# EAGLE board LoraGateway (EAGLE 9.3.0)

Size 65 x 30 mm. Coordinates in mm from the lower left corner, seen from the top.
Outline: 0,27 0,3 arc90 3,0 62,0 arc90 65,3 65,27 arc90 62,30 3,30 arc90 0,27
Copper layers (1*2*15*16): Top 0.035mm / dielectric 0.2mm / Route2 0.035mm / dielectric 1.2mm / Route15 0.035mm / dielectric 0.2mm / Bottom 0.035mm
Design rules "Elecrow_4-layer_PCB_eagle_rule": minimum track width 6mil, minimum drill 12mil, track to track 6mil, track to pad 6mil, pad to pad 6mil, via to via 8mil, smd to smd 0mil, copper to edge 20mil, drill to drill 10mil, minimum pad ring 6mil, minimum via ring 6mil, stop-mask expansion 0mil, vias tented up to drill 100mil, thermal gap 10mil
Net classes: 0 default: width 0.2 mm

## Footprints (pad centres in the part's own frame; a part is rotated, then mirrored left to right if it is on the bottom)
C1206 = smd 1.6 x 1.8: 1 -1.4,0; 2 1.4,0
C0805 = smd 1.3 x 1.5: 1 -0.95,0; 2 0.95,0
C0603 = smd 1.1 x 1: 1 -0.85,0; 2 0.85,0
C0402 = smd 0.7 x 0.9: 1 -0.65,0; 2 0.65,0
SLP1006P2T = smd 0.6 x 0.55: 1 0,0.425; 2 0,-0.425
SOD523 = smd 0.7 x 0.5: A 0.7,0; C -0.6,0
LXES15AAA1-153 = smd 0.4 x 0.5: 1 -0.4,0; 2 0.4,0
L0402 = smd 0.6 x 0.7: 1 -0.5,0; 2 0.5,0
L0603 = smd 1 x 1.1: 1 -0.85,0; 2 0.85,0
RPI-ZERO = drill 1 pad 1.778 square: 1 8.37,25.23 | drill 1 pad 1.778: 2 8.37,27.77; 3 10.91,25.23; 4 10.91,27.77; 5 13.45,25.23; 6 13.45,27.77; 7 15.99,25.23; 8 15.99,27.77; 9 18.53,25.23; 10 18.53,27.77; 11 21.07,25.23; 12 21.07,27.77; 13 23.61,25.23; 14 23.61,27.77; 15 26.15,25.23; 16 26.15,27.77; 17 28.69,25.23; 18 28.69,27.77; 19 31.23,25.23; 20 31.23,27.77; 21 33.77,25.23; 22 33.77,27.77; 23 36.31,25.23; 24 36.31,27.77; 25 38.85,25.23; 26 38.85,27.77; 27 41.39,25.23; 28 41.39,27.77; 29 43.93,25.23; 30 43.93,27.77; 31 46.47,25.23; 32 46.47,27.77; 33 49.01,25.23; 34 49.01,27.77; 35 51.55,25.23; 36 51.55,27.77; 37 54.09,25.23; 38 54.09,27.77; 39 56.63,25.23; 40 56.63,27.77 | hole 2.75: 3.5,3.5; 61.5,3.5; 61.5,26.5; 3.5,26.5
ASPI-0418 = smd 1.5 x 3.6: 1 -1.525,0; 2 1.525,0
LTST-C930KGKT = smd 1.1 x 2.8: 1 -1.55,0; 2 1.55,0
R0402 = smd 0.6 x 0.7: 1 -0.5,0; 2 0.5,0
EXB28V = smd 0.525 x 0.5: 1 -0.875,-0.45; 4 0.875,-0.45; 5 0.875,0.45; 8 -0.875,0.45 | smd 0.25 x 0.5: 2 -0.25,-0.45; 3 0.25,-0.45; 6 0.25,0.45; 7 -0.25,0.45
2X3MLPQ-W18 = smd 0.775 x 0.2: 1 -0.963,1.2; 2 -0.963,0.8; 3 -0.963,0.4; 4 -0.963,0; 5 -0.963,-0.4; 6 -0.963,-0.8; 7 -0.963,-1.2; 10 0.963,-1.2; 11 0.963,-0.8; 12 0.963,-0.4; 13 0.963,0; 14 0.963,0.4; 15 0.963,0.8; 16 0.963,1.2 | smd 0.2 x 0.775: 8 -0.2,-1.462; 9 0.2,-1.462; 17 0.2,1.462; 18 -0.2,1.462 | smd 0.286 x 0.7: T1 0,0.5; T2 0,-0.5
MLPQ-UT8 = smd 0.75 x 0.2: 1 -0.725,0.4; 2 -0.725,0; 3 -0.725,-0.4; 5 0.725,-0.4; 6 0.725,0; 7 0.725,0.4 | smd 0.2 x 0.75: 4 0,-0.725; 8 0,0.725
3X3MLPD-8 = smd 0.4 x 0.75: 1 -0.975,-1.475; 2 -0.325,-1.475; 3 0.325,-1.475; 4 0.975,-1.475; 5 0.975,1.475; 6 0.325,1.475; 7 -0.325,1.475; 8 -0.975,1.475 | smd 2.58 x 1.7: GND 0,0
QFN64-9X9 = smd 0.85 x 0.3: 1 -4.475,3.75; 2 -4.475,3.25; 3 -4.475,2.75; 4 -4.475,2.25; 5 -4.475,1.75; 6 -4.475,1.25; 7 -4.475,0.75; 8 -4.475,0.25; 9 -4.475,-0.25; 10 -4.475,-0.75; 11 -4.475,-1.25; 12 -4.475,-1.75; 13 -4.475,-2.25; 14 -4.475,-2.75; 15 -4.475,-3.25; 16 -4.475,-3.75; 33 4.475,-3.75; 34 4.475,-3.25; 35 4.475,-2.75; 36 4.475,-2.25; 37 4.475,-1.75; 38 4.475,-1.25; 39 4.475,-0.75; 40 4.475,-0.25; 41 4.475,0.25; 42 4.475,0.75; 43 4.475,1.25; 44 4.475,1.75; 45 4.475,2.25; 46 4.475,2.75; 47 4.475,3.25; 48 4.475,3.75 | smd 0.3 x 0.85: 17 -3.75,-4.475; 18 -3.25,-4.475; 19 -2.75,-4.475; 20 -2.25,-4.475; 21 -1.75,-4.475; 22 -1.25,-4.475; 23 -0.75,-4.475; 24 -0.25,-4.475; 25 0.25,-4.475; 26 0.75,-4.475; 27 1.25,-4.475; 28 1.75,-4.475; 29 2.25,-4.475; 30 2.75,-4.475; 31 3.25,-4.475; 32 3.75,-4.475; 49 3.75,4.475; 50 3.25,4.475; 51 2.75,4.475; 52 2.25,4.475; 53 1.75,4.475; 54 1.25,4.475; 55 0.75,4.475; 56 0.25,4.475; 57 -0.25,4.475; 58 -0.75,4.475; 59 -1.25,4.475; 60 -1.75,4.475; 61 -2.25,4.475; 62 -2.75,4.475; 63 -3.25,4.475; 64 -3.75,4.475 | smd 7.3 x 7.3: EXP 0,0
QFN32 = smd 0.8 x 0.3: 1 -2.45,1.75; 2 -2.45,1.25; 3 -2.45,0.75; 4 -2.45,0.25; 5 -2.45,-0.25; 6 -2.45,-0.75; 7 -2.45,-1.25; 8 -2.45,-1.75; 17 2.45,-1.75; 18 2.45,-1.25; 19 2.45,-0.75; 20 2.45,-0.25; 21 2.45,0.25; 22 2.45,0.75; 23 2.45,1.25; 24 2.45,1.75 | smd 0.3 x 0.8: 9 -1.75,-2.45; 10 -1.25,-2.45; 11 -0.75,-2.45; 12 -0.25,-2.45; 13 0.25,-2.45; 14 0.75,-2.45; 15 1.25,-2.45; 16 1.75,-2.45; 25 1.75,2.45; 26 1.25,2.45; 27 0.75,2.45; 28 0.25,2.45; 29 -0.25,2.45; 30 -0.75,2.45; 31 -1.25,2.45; 32 -1.75,2.45 | smd 3.3 x 3.3: EXP 0,0
DCC6C-3X3 = smd 0.6 x 1.65: 1 -1.2,0.85 | smd 0.6 x 0.95: 2 0,1.2; 5 0,-1.2 | smd 0.6 x 0.85: 3 1.2,1.25; 4 1.2,-1.25; 6 -1.2,-1.25
VQFN24-4X4 = smd 0.7 x 0.3: 1 -1.9,1.25; 2 -1.9,0.75; 3 -1.9,0.25; 4 -1.9,-0.25; 5 -1.9,-0.75; 6 -1.9,-1.25; 13 1.9,-1.25; 14 1.9,-0.75; 15 1.9,-0.25; 16 1.9,0.25; 17 1.9,0.75; 18 1.9,1.25 | smd 0.3 x 0.7: 7 -1.25,-1.9; 8 -0.75,-1.9; 9 -0.25,-1.9; 10 0.25,-1.9; 11 0.75,-1.9; 12 1.25,-1.9; 19 1.25,1.9; 20 0.75,1.9; 21 0.25,1.9; 22 -0.25,1.9; 23 -0.75,1.9; 24 -1.25,1.9 | smd 2.5 x 2.5: GND 0,0
USB-2-MICRO = smd 0.4 x 1.4: 1 -1.3,4.3; 2 -0.65,4.3; 3 0,4.3; 4 0.65,4.3; 5 1.3,4.3 | smd 2.3 x 1.9: 6 -3.75,1.45; 9 3.75,1.45 | smd 1.8 x 1.9: 7 -1.15,1.45; 8 1.15,1.45
2.5X2.0MM = smd 1 x 1: 1 -0.825,-0.625; 2 0.825,-0.625; 3 0.825,0.625; 4 -0.825,0.625
2.0X1.6MM = smd 0.6 x 0.8: 1 -0.9,-0.6; 2 0.9,-0.6; 3 0.9,0.6; 4 -0.9,0.6
J502-ND-142-0711-871/876 = smd 4.25 x 1.5: 1 -0.2,0 | smd 3.95 x 1.5: G@1 -0.35,-2.77; G@2 -0.35,2.77 | smd 3.95 x 1.5 bottom: G@3 -0.35,2.77; G@4 -0.35,-2.77

## Placement (x,y rotation side)
C1  22uF  [C1206]  7.6,87.45 180 bottom  (outside the outline)
C2  10uF  [C1206]  6,91.2 90 bottom  (outside the outline)
C3  10uF  [C1206]  12.75,92.8 270 bottom  (outside the outline)
C4  22uF  [C1206]  10.25,96.45 0 bottom  (outside the outline)
C5  1µF  [C0805]  -0.95,84 180 top  (outside the outline)
C6  2.2uF  [C0603]  52.45,80.9 0 bottom  (outside the outline)
C7  10uF  [C0805]  79.2,87.58 90 bottom  (outside the outline)
C8  100nF  [C0402]  58.7,80.9 90 bottom  (outside the outline)
C9  1uF  [C0805]  52.95,82.95 0 bottom  (outside the outline)
C10  10uF  [C0805]  80.2,91.75 0 bottom  (outside the outline)
C11  1uF  [C0805]  52.95,78.85 0 bottom  (outside the outline)
C23  10µF  [C0805]  36.15,72.05 270 top  (outside the outline)
C24  10nF  [C0402]  42.2,89.28 270 top  (outside the outline)
C25  1µF  [C0603]  26.65,79.4 180 top  (outside the outline)
C26  100nF  [C0402]  26.65,80.95 180 top  (outside the outline)
C27  100nF  [C0402]  26.65,77.85 180 top  (outside the outline)
C28  56pF  [C0402]  82.05,79.65 0 bottom  (outside the outline)
C29  56pF  [C0402]  82.05,76.5 0 bottom  (outside the outline)
C30  100nF  [C0402]  32.9,87.85 90 top  (outside the outline)
C31  100nF  [C0402]  34.6,72.35 270 top  (outside the outline)
C32  100nF  [C0402]  37.7,72.35 270 top  (outside the outline)
C33  100nF  [C0402]  37.7,87.35 90 top  (outside the outline)
C34  1µF  [C0603]  39.25,87.35 90 top  (outside the outline)
C35  100nF  [C0402]  42,80.35 0 top  (outside the outline)
C36  10µF  [C0805]  24.9,87.7 0 bottom  (outside the outline)
C37  1µF  [C0603]  25,83.6 0 bottom  (outside the outline)
C38  1µF  [C0603]  51.9,86.75 270 top  (outside the outline)
C39  100nF  [C0402]  48.8,82.65 180 bottom  (outside the outline)
C40  1nF  [C0402]  53.2,96.4 90 top  (outside the outline)
C41  100nF  [C0402]  54.9,96.4 270 top  (outside the outline)
C42  100nF  [C0402]  56.5,96.4 270 top  (outside the outline)
C43  10nF  [C0402]  60.6,96.4 270 top  (outside the outline)
C44  56pF  [C0402]  65.4,88.2 270 top  (outside the outline)
C45  1µF  [C0603]  58.05,96.2 90 top  (outside the outline)
C46  1µF  [C0603]  62.15,96.2 90 top  (outside the outline)
C47  1µF  [C0603]  50.2,66.55 180 top  (outside the outline)
C48  1nF  [C0402]  53.5,74.4 90 top  (outside the outline)
C49  100nF  [C0402]  54.6,74.4 270 top  (outside the outline)
C50  100nF  [C0402]  55.7,74.4 270 top  (outside the outline)
C51  10nF  [C0402]  59.65,74.4 270 top  (outside the outline)
C52  100nF  [C0402]  59.9,65.7 270 top  (outside the outline)
C53  1µF  [C0603]  61.2,74.2 90 top  (outside the outline)
C54  1µF  [C0603]  57.25,74.2 90 top  (outside the outline)
C55  56pF  [C0402]  67.6,86.85 270 top  (outside the outline)
C56  56pF  [C0402]  78.35,74.35 0 top  (outside the outline)
C57  5.6pF  [C0402]  80.45,75 90 top  (outside the outline)
C58  4.7µF  [C0603]  87,87.65 180 top  (outside the outline)
C59  3.3pF  [C0402]  82.95,81.75 180 top  (outside the outline)
C60  10nF  [C0402]  90.25,87.3 180 top  (outside the outline)
C61  56pF  [C0402]  86.8,76.45 90 top  (outside the outline)
C62  150pF  [C0402]  87.2,83.9 180 top  (outside the outline)
C63  22pF  [C0402]  90.25,83.9 180 top  (outside the outline)
C64  1nF  [C0402]  94,86.1 0 top  (outside the outline)
C65  3.3pF  [C0402]  95.5,78.6 270 top  (outside the outline)
C66  33pF  [C0402]  94,87.3 0 top  (outside the outline)
C67  7.5pF  [C0402]  97.2,84.3 0 top  (outside the outline)
C68  1.5pF  [C0402]  97.85,80.3 0 top  (outside the outline)
C69  3.3pF  [C0402]  100.2,78.6 270 top  (outside the outline)
C70  5.1pF  [C0402]  97.2,83.2 0 top  (outside the outline)
C71  2.7pF  [C0402]  104.05,78.6 270 top  (outside the outline)
C72  5.1pF  [C0402]  97.2,82 0 top  (outside the outline)
C73  56pF  [C0402]  107.35,79.25 0 top  (outside the outline)
C74  100nF  [C0402]  59.85,87.05 270 top  (outside the outline)
D1  RCLAMP0531T  [SLP1006P2T]  -2.1,78.28 0 top  (outside the outline)
D2  RCLAMP0531T  [SLP1006P2T]  -0.9,81.72 180 top  (outside the outline)
D5  BAT54XV2T1G  [SOD523]  51.25,92.75 180 top  (outside the outline)
D6  BAT54XV2T1G  [SOD523]  52.15,72.4 90 top  (outside the outline)
D7  LXES15AAA1-153  [LXES15AAA1-153]  105.3,78.85 270 top  (outside the outline)
FB1  [L0402]  -8,85.95 180 top  (outside the outline)
FB2  [L0402]  -2.1,81.8 90 top  (outside the outline)
FB3  [L0402]  -1,78.25 270 top  (outside the outline)
FB4  [L0402]  81.03,85.35 90 bottom  (outside the outline)
FB7  [L0402]  43.35,90.42 270 top  (outside the outline)
FB8  [L0402]  25.85,85.65 270 bottom  (outside the outline)
FB9  [L0402]  48.65,83.7 0 bottom  (outside the outline)
FB10  [L0603]  87,89.7 0 top  (outside the outline)
J1  RPI-ZERO-HEADER  [RPI-ZERO]  65,30 180 top
L1  2.2µ  [ASPI-0418]  2.45,89.65 270 bottom  (outside the outline)
L2  2.2µ  [ASPI-0418]  16.35,94.35 270 bottom  (outside the outline)
L3  33nH  [L0402]  63.65,74.35 180 top  (outside the outline)
L4  3.9nH  [L0402]  75.75,74.35 180 top  (outside the outline)
L5  3.3nH  [L0402]  87.85,85.6 90 top  (outside the outline)
L6  4.7nH  [L0402]  90.9,85.6 90 top  (outside the outline)
L7  6.8nH  [L0402]  91.95,85.6 270 top  (outside the outline)
L8  2.7nH  [L0402]  94.65,84.5 180 top  (outside the outline)
L9  5.6nH  [L0402]  97.85,79.25 180 top  (outside the outline)
L10  5.6nH  [L0402]  102.15,79.25 180 top  (outside the outline)
L11  6.2nH  [L0402]  95.15,82.5 90 top  (outside the outline)
P2  LTST-C930KGKT  [LTST-C930KGKT]  72.2,90.3 270 top  (outside the outline)
P3  LTST-C930KGKT  [LTST-C930KGKT]  76.2,90.3 270 top  (outside the outline)
R1  16k  [R0402]  26,70.05 180 top  (outside the outline)
R2  12k  [R0402]  26,69 0 top  (outside the outline)
R4  10k  [R0402]  59.85,81.4 270 bottom  (outside the outline)
R5  10k  [R0402]  57.15,82.65 0 bottom  (outside the outline)
R12  10k  [R0402]  23.05,85.1 270 top  (outside the outline)
R13  100  [R0402]  82.2,78.6 0 bottom  (outside the outline)
R14  100  [R0402]  82.2,77.55 0 bottom  (outside the outline)
R15  0  [R0402]  37.85,90.42 90 top  (outside the outline)
R16  470  [R0402]  72.7,93.3 180 top  (outside the outline)
R17  470  [R0402]  75.7,93.3 0 top  (outside the outline)
R18  100  [R0402]  47.4,91.75 0 top  (outside the outline)
R19  100  [R0402]  50.45,72.95 0 top  (outside the outline)
R20  EXB-N8V101JX  [EXB28V]  48,86 0 top  (outside the outline)
R21  EXB-N8V101JX  [EXB28V]  48,74 180 top  (outside the outline)
R22  100  [R0402]  50.45,71.9 180 top  (outside the outline)
R23  300  [R0402]  77.55,81.25 270 top  (outside the outline)
R24  18  [R0402]  79.2,81.75 180 top  (outside the outline)
R25  300  [R0402]  80.85,81.25 270 top  (outside the outline)
R26  49R9  [R0402]  85.6,77.2 90 top  (outside the outline)
R27  49R9  [R0402]  95,76.55 180 top  (outside the outline)
U1  SC283  [2X3MLPQ-W18]  9,92 180 bottom  (outside the outline)
U2  SC560H  [MLPQ-UT8]  56.65,80.9 180 bottom  (outside the outline)
U3  [3X3MLPD-8]  22,70 0 top  (outside the outline)
U5  [QFN64-9X9]  35,80 0 top  (outside the outline)
U6  SX1257  [QFN32]  56,91 270 top  (outside the outline)
U7  SX1257  [QFN32]  56,69 270 top  (outside the outline)
U8  [DCC6C-3X3]  74.75,81.75 90 top  (outside the outline)
U9  [DCC6C-3X3]  83.35,74.35 270 top  (outside the outline)
U10  SE2435L  [VQFN24-4X4]  91.15,80 0 top  (outside the outline)
U11  [DCC6C-3X3]  91.4,73.35 270 top  (outside the outline)
X1  USB2-MICRO  [USB-2-MICRO]  -9.95,80 270 top  (outside the outline)
X3  END4825A  [2.5X2.0MM]  40.2,90.55 180 top  (outside the outline)
X4  END4263A  [2.0X1.6MM]  48.8,80.65 270 bottom  (outside the outline)
X5  SMA-KE11  [J502-ND-142-0711-871/876]  111.56,79.25 0 top  (outside the outline)

## Library data of the parts
C1 C4 = rcl; OC_DIGIKEY: 445-6001-1-ND; SPICEPREFIX: C
C2 C3 = rcl; OC_DIGIKEY: 490-5525-1-ND; SPICEPREFIX: C
C5 C9 C11 = rcl; OC_DIGIKEY: 490-1691-1-ND; SPICEPREFIX: C
C6 = rcl; OC_DIGIKEY: 1276-1878-1-ND; SPICEPREFIX: C
C7 C10 C23 C36 = rcl; OC_DIGIKEY: 1276-2399-1-ND; SPICEPREFIX: C
C8 C26 C27 C30-C33 C35 C39 C41 C42 C49 C50 C52 C74 = rcl; OC_DIGIKEY: 478-7888-1-ND; SPICEPREFIX: C
C24 C43 C51 C60 = rcl; OC_DIGIKEY: 478-7867-1-ND; SPICEPREFIX: C
C25 C34 C37 C38 C45-C47 C53 C54 = rcl; OC_DIGIKEY: 490-1543-1-ND; SPICEPREFIX: C
C28 C29 C44 C55 C56 C61 C73 = rcl; OC_DIGIKEY: 490-1288-1-ND; SPICEPREFIX: C
C40 C48 C64 = rcl; OC_DIGIKEY: 490-6348-1-ND; SPICEPREFIX: C
C57 = rcl; OC_DIGIKEY: 490-6250-1-ND; SPICEPREFIX: C
C58 = rcl; OC_DIGIKEY: 1276-1905-1-ND; SPICEPREFIX: C
C59 C65 C69 = rcl; OC_DIGIKEY: 490-6238-1-ND; SPICEPREFIX: C
C62 = rcl; OC_DIGIKEY: 311-1025-1-ND; SPICEPREFIX: C
C63 = rcl; OC_DIGIKEY: 490-11382-1-ND; SPICEPREFIX: C
C66 = rcl; OC_DIGIKEY: 490-5936-1-ND; SPICEPREFIX: C
C67 = rcl; OC_DIGIKEY: 490-8227-1-ND; SPICEPREFIX: C
C68 = rcl; OC_DIGIKEY: 490-6212-1-ND; SPICEPREFIX: C
C70 C72 = rcl; OC_DIGIKEY: 490-8215-1-ND; SPICEPREFIX: C
C71 = rcl; OC_DIGIKEY: 490-6229-1-ND; SPICEPREFIX: C
D1 D2 = LoRa Gateway; OC_DIGIKEY: RCLAMP0531TTCTCT-ND
D5 D6 = LoRa Gateway; OC_DIGIKEY: BAT54XV2T1GOSCT-ND
D7 = LoRa Gateway; OC_DIGIKEY: 490-13210-1-ND
FB1-FB4 FB7-FB9 = LoRa Gateway; OC_DIGIKEY: 490-5976-1-ND
FB10 = LoRa Gateway; OC_DIGIKEY: 490-7815-1-ND
J1 U3 = LoRa Gateway
L1 L2 = LoRa Gateway; OC_DIGIKEY: 535-10759-1-ND
L3 = LoRa Gateway; OC_DIGIKEY: 490-1152-1-ND
L4 = LoRa Gateway; OC_DIGIKEY: 490-6815-1-ND
L5 = LoRa Gateway; OC_DIGIKEY: 490-6809-1-ND
L6 = LoRa Gateway; OC_DIGIKEY: 490-1139-1-ND
L7 = LoRa Gateway; OC_DIGIKEY: 490-1142-1-ND
L8 = LoRa Gateway; OC_DIGIKEY: 490-1137-1-ND
L9 L10 = LoRa Gateway; OC_DIGIKEY: 490-6834-1-ND
L11 = LoRa Gateway; OC_DIGIKEY: 490-1141-1-ND
P2 P3 = LoRa Gateway; OC_DIGIKEY: 160-1463-1-ND
R1 R2 R4 R12 = rcl; OC_DIGIKEY: 541-10KJCT-ND; SPICEPREFIX: R
R5 = rcl; OC_DIGIKEY: 311-100KJRCT-ND; SPICEPREFIX: R
R13 R14 R18 R19 R22 = rcl; OC_DIGIKEY: 541-100ATCT-ND; SPICEPREFIX: R
R15 = rcl; OC_DIGIKEY: 541-4062-1-ND; SPICEPREFIX: R
R16 R17 = rcl; OC_DIGIKEY: 311-470JRCT-ND; SPICEPREFIX: R
R20 R21 = LoRa Gateway; OC_DIGIKEY: Y10101CT-ND
R23 R25 = rcl; OC_DIGIKEY: RMCF0402FT300RCT-ND; SPICEPREFIX: R
R24 = rcl; OC_DIGIKEY: A129606CT-ND; SPICEPREFIX: R
R26 R27 = rcl; OC_DIGIKEY: 541-3967-1-ND; SPICEPREFIX: R
U1 = LoRa Gateway; OC_DIGIKEY: SC283WLCT-ND
U2 = LoRa Gateway; OC_DIGIKEY: SC560HULCT-ND
U5 = LoRa Gateway; OC_DIGIKEY: SX1308IMLTRTCT-ND
U6 U7 = LoRa Gateway; OC_DIGIKEY: SX1257IWLTRTCT-ND
U8 U9 U11 = LoRa Gateway; OC_DIGIKEY: 495-3734-1-ND
U10 = LoRa Gateway; OC_DIGIKEY: 863-1349-1-ND
X1 = LoRa Gateway; OC_DIGIKEY: 609-4052-1-ND
X3 = LoRa Gateway; OC_DIGIKEY: 644-1329-1-ND
X4 = LoRa Gateway; OC_DIGIKEY: 644-1328-1-ND
X5 = LoRa Gateway; OC_DIGIKEY: 931-1175-ND

## Nets
133M_OUT_EN: X3.1
+5V: C2.1 C3.1 C5.2 C6.1 FB2.2 R4.1 R5.1 U1.1 U1.5 U1.8 U1.10 U1.14 U1.15 U1.16 U1.17 U2.2
CLKHS: R15.2 U5.53
CLKI: R18.2 U6.11
CLKO_B: R19.2 R22.1 U7.10
CLKO_B_32M: R22.2
FEM_EN: U3.2 U10.1
GND: C1.2 C2.2 C3.2 C4.2 C5.1 C6.2 C7.2 C8.2 C9.2 C10.2 C11.2 C23.2 C24.2 C25.2 C26.2 C27.2 C28.2 C29.2 C30.2 C31.2 C32.2 C33.2 C34.2 C35.2 C36.2 C37.2 C38.2 C39.2 C41.1 C42.1 C43.1 C44.2 C45.2 C46.2 C47.2 C49.1 C50.1 C51.1 C52.2 C53.2 C54.2 C57.2 C58.2 C60.2 C62.2 C63.2 C64.2 C65.2 C66.2 C67.2 C69.2 C70.2 C71.2 C72.2 C74.2 D1.2 D2.2 D7.2 FB1.1 FB3.2 L3.2 P2.2 P3.2 R2.1 R12.1 R21.1 R21.2 R21.7 R21.8 R23.2 R25.2 R26.1 R27.1 U1.3 U1.4 U1.6 U1.7 U1.12 U1.13 U1.T1 U1.T2 U2.5 U3.8 U3.GND U5.6 U5.7 U5.10 U5.11 U5.16 U5.24 U5.30 U5.31 U5.32 U5.33 U5.34 U5.40 U5.41 U5.48 U5.49 U5.50 U5.51 U5.59 U5.EXP U6.4 U6.7 U6.26 U6.28 U6.31 U6.EXP U7.4 U7.7 U7.12 U7.13 U7.26 U7.28 U7.31 U7.EXP U8.1 U8.3 U8.4 U8.6 U9.1 U9.3 U9.4 U9.6 U10.7 U10.8 U10.10 U10.13 U10.15 U10.17 U10.18 U10.GND U11.1 U11.3 U11.4 U11.6 X3.2 X4.1 X4.2 X5.G@1 X5.G@2 X5.G@3 X5.G@4
GPIO0: U5.58
GPIO2: U5.56
GPIO3: U5.55
IRXD_A: R20.5 U6.15
IRXD_B: R21.5 U7.15
ITXD_A: R20.7 U6.13
LNA_EN: C28.1 R13.1 U10.3
MISO_A: U5.62 U6.18
MISO_B: U5.21 U7.18
MOSI_A: U5.63 U6.19
MOSI_B: U5.20 U7.19
N$1: L1.1 U1.2
N$2: L2.2 U1.11
N$3: R1.1 R2.2 U3.7
N$4: C8.1 U2.7
N$6: D1.1 FB3.1 X1.5
N$9: FB1.2 X1.6 X1.7 X1.8 X1.9
N$12: C7.1 FB4.2 U3.3
N$13: C74.1 U6.25
N$14: P2.1 R16.2
N$15: P3.1 R17.2
N$16: C24.1 FB7.2 X3.4
N$17: R15.1 X3.3
N$18: C39.1 FB9.2 X4.4
N$19: R27.2 U10.12
N$20: U10.9 U11.5
N$21: U10.11 U11.2
N$22: R26.2 U10.5
N$23: C63.1 L6.1 U10.23
N$24: C67.1 C70.1 L8.1 L11.2
N$25: C62.1 L5.1 U10.24
N$26: L7.2 U10.21
N$27: C68.2 C69.1 L9.1 L10.2
N$28: R13.2 U5.14
N$29: R14.2 U5.15
N$30: L8.2 U10.20
N$31: C72.1 L11.1 U10.16
N$32: C65.1 C68.1 L9.2 U10.14
N$34: C71.1 C73.1 D7.1 L10.1
N$35: C59.1 U10.2
N$36: C61.2 U10.6
N$37: C59.2 R24.1 R25.1
N$38: C31.1 U5.23
N$39: R23.1 R24.2 U8.5
N$40: C55.2 U8.2
N$41: C61.1 U9.2
N$43: C56.2 C57.1 U9.5
N$44: C56.1 L4.1
N$45: R18.1 U5.39
N$46: C55.1 U6.30
N$47: C52.1 U7.25
N$48: D6.C U7.9
N$49: C48.1 U7.8
N$50: R21.3 U5.36
N$51: R21.4 U5.35
N$52: C40.1 U6.8
N$53: C43.2 U6.1
N$54: C51.2 U7.1
N$55: C50.2 U7.3
N$56: C49.2 U7.5
N$57: C42.2 U6.3
N$58: R19.1 U5.43
N$59: R20.4 U5.44
N$60: R20.3 U5.45
N$61: R20.2 U5.46
N$62: R20.1 U5.47
N$63: C41.2 U6.5
N$64: C44.1 U6.29
N$65: C73.2 X5.1
N$67: C33.1 C34.1 U5.52
N$70: D5.C U6.9
NSS_A: U5.64 U6.20
NSS_B: U5.19 U7.20
PA_EN: C29.1 R14.1 U10.4
PPS: U5.9
QRXD_A: R20.6 U6.14
QRXD_B: R21.6 U7.14
QTXD_A: R20.8 U6.12
RADIO_EN_A: R4.2 U2.6
RADIO_EN_B: R5.2 U2.4
RADIO_RST: D5.A D6.A
RESET: R12.2 U5.1
RF_IN: L3.1 L4.2 U6.27 U7.27
RX_ON: R17.1 U5.57
SCK_A: U5.61 U6.17
SCK_B: U5.22 U7.17
SPI_MISO: U5.3
SPI_MOSI: U5.4
SPI_NSS: U5.5
SPI_SCK: U5.2
TX_ON: R16.1 U5.54
VBUS: D2.1 FB2.1 X1.1
VCC: C4.1 C36.1 FB8.1 L2.1 U1.9
VCC_FEM: C58.1 C64.1 C66.1 FB10.2 L5.2 L7.1
VCCA_A: C9.1 C38.1 C45.1 C46.1 C60.1 FB9.1 L6.2 U2.3 U6.2 U6.16 U6.32
VCCA_B: C11.1 C47.1 C53.1 C54.1 U2.1 U7.2 U7.16 U7.32
VCCDIG18: C25.1 C26.1 C27.1 C30.1 C35.1 C37.1 FB8.2 U5.8 U5.12 U5.42 U5.60
VCCDIG33: C1.1 C23.1 C32.1 FB4.1 FB7.1 L1.2 U1.18 U5.29
VCCINT: C10.1 FB10.1 R1.2 U3.6
XTL_OUT: C40.2 C48.2 X4.3

## Tracks (layer width: path | path; a pad name or v marks a point on that pad's centre or on a via)
+5V  (15 unrouted)
CLKHS  (1 unrouted)
CLKI  (1 unrouted)
CLKO_B  (2 unrouted)
FEM_EN  (1 unrouted)
GND  (143 unrouted)
IRXD_A  (1 unrouted)
IRXD_B  (1 unrouted)
ITXD_A  (1 unrouted)
LNA_EN  (2 unrouted)
MISO_A  (1 unrouted)
MISO_B  (1 unrouted)
MOSI_A  (1 unrouted)
MOSI_B  (1 unrouted)
N$1  (1 unrouted)
N$2  (1 unrouted)
N$3  (2 unrouted)
N$4  (1 unrouted)
N$6  (2 unrouted)
N$9  (1 unrouted)
N$12  (2 unrouted)
N$13  (1 unrouted)
N$14  (1 unrouted)
N$15  (1 unrouted)
N$16  (2 unrouted)
N$17  (1 unrouted)
N$18  (2 unrouted)
N$19  (1 unrouted)
N$20  (1 unrouted)
N$21  (1 unrouted)
N$22  (1 unrouted)
N$23  (2 unrouted)
N$24  (3 unrouted)
N$25  (2 unrouted)
N$26  (1 unrouted)
N$27  (3 unrouted)
N$28  (1 unrouted)
N$29  (1 unrouted)
N$30  (1 unrouted)
N$31  (2 unrouted)
N$32  (3 unrouted)
N$34  (3 unrouted)
N$35  (1 unrouted)
N$36  (1 unrouted)
N$37  (2 unrouted)
N$38  (1 unrouted)
N$39  (2 unrouted)
N$40  (1 unrouted)
N$41  (1 unrouted)
N$43  (2 unrouted)
N$44  (1 unrouted)
N$45  (1 unrouted)
N$46  (1 unrouted)
N$47  (1 unrouted)
N$48  (1 unrouted)
N$49  (1 unrouted)
N$50  (1 unrouted)
N$51  (1 unrouted)
N$52  (1 unrouted)
N$53  (1 unrouted)
N$54  (1 unrouted)
N$55  (1 unrouted)
N$56  (1 unrouted)
N$57  (1 unrouted)
N$58  (1 unrouted)
N$59  (1 unrouted)
N$60  (1 unrouted)
N$61  (1 unrouted)
N$62  (1 unrouted)
N$63  (1 unrouted)
N$64  (1 unrouted)
N$65  (1 unrouted)
N$67  (2 unrouted)
N$70  (1 unrouted)
NSS_A  (1 unrouted)
NSS_B  (1 unrouted)
PA_EN  (2 unrouted)
QRXD_A  (1 unrouted)
QRXD_B  (1 unrouted)
QTXD_A  (1 unrouted)
RADIO_EN_A  (1 unrouted)
RADIO_EN_B  (1 unrouted)
RADIO_RST  (1 unrouted)
RESET  (1 unrouted)
RF_IN  (3 unrouted)
RX_ON  (1 unrouted)
SCK_A  (1 unrouted)
SCK_B  (1 unrouted)
TX_ON  (1 unrouted)
VBUS  (2 unrouted)
VCC  (4 unrouted)
VCC_FEM  (5 unrouted)
VCCA_A  (10 unrouted)
VCCA_B  (7 unrouted)
VCCDIG18  (10 unrouted)
VCCDIG33  (7 unrouted)
VCCINT  (3 unrouted)
XTL_OUT  (2 unrouted)